# Allegro board MV2.brd
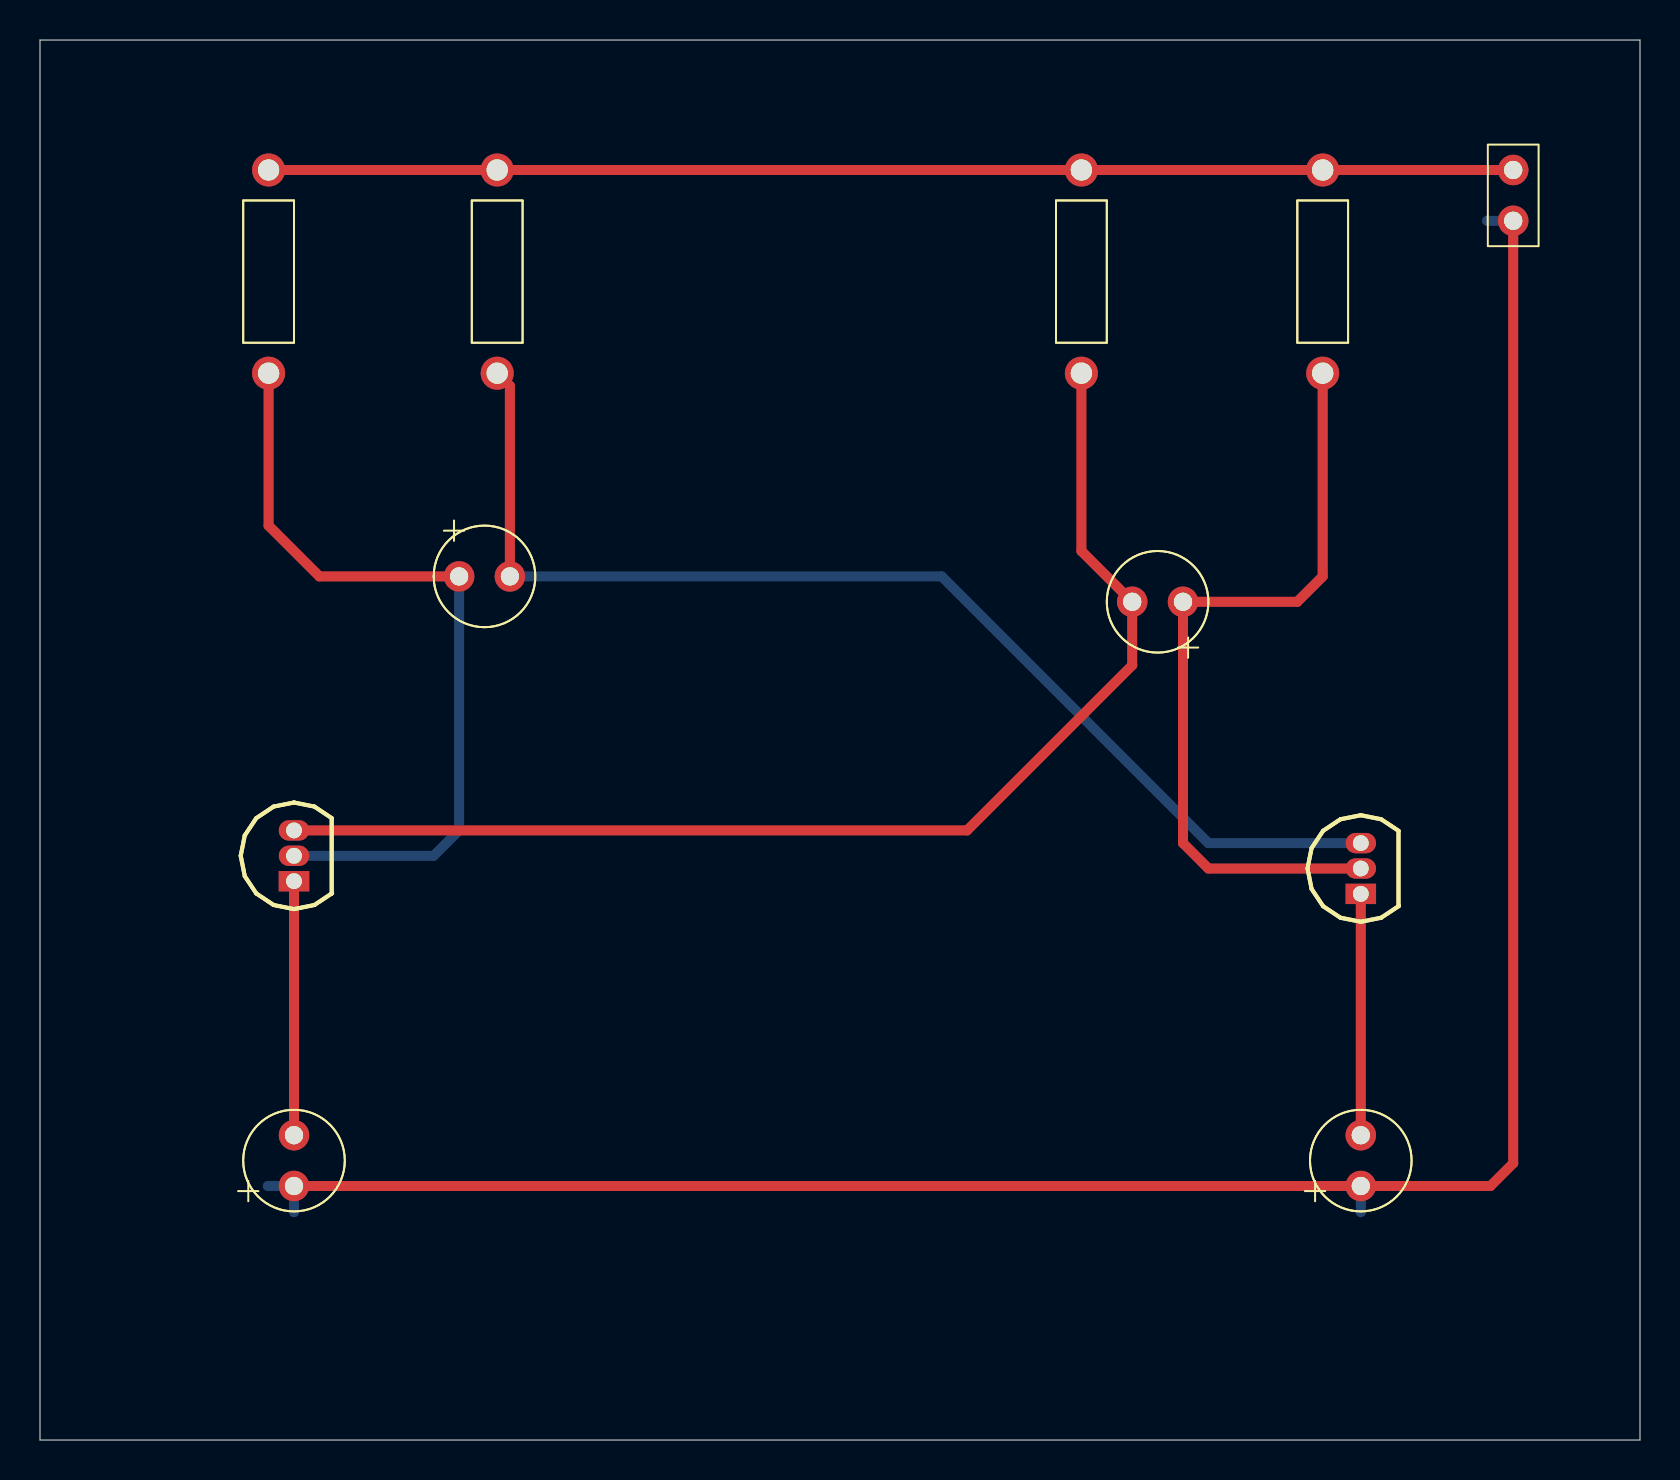
[diagram p0: board, top side]
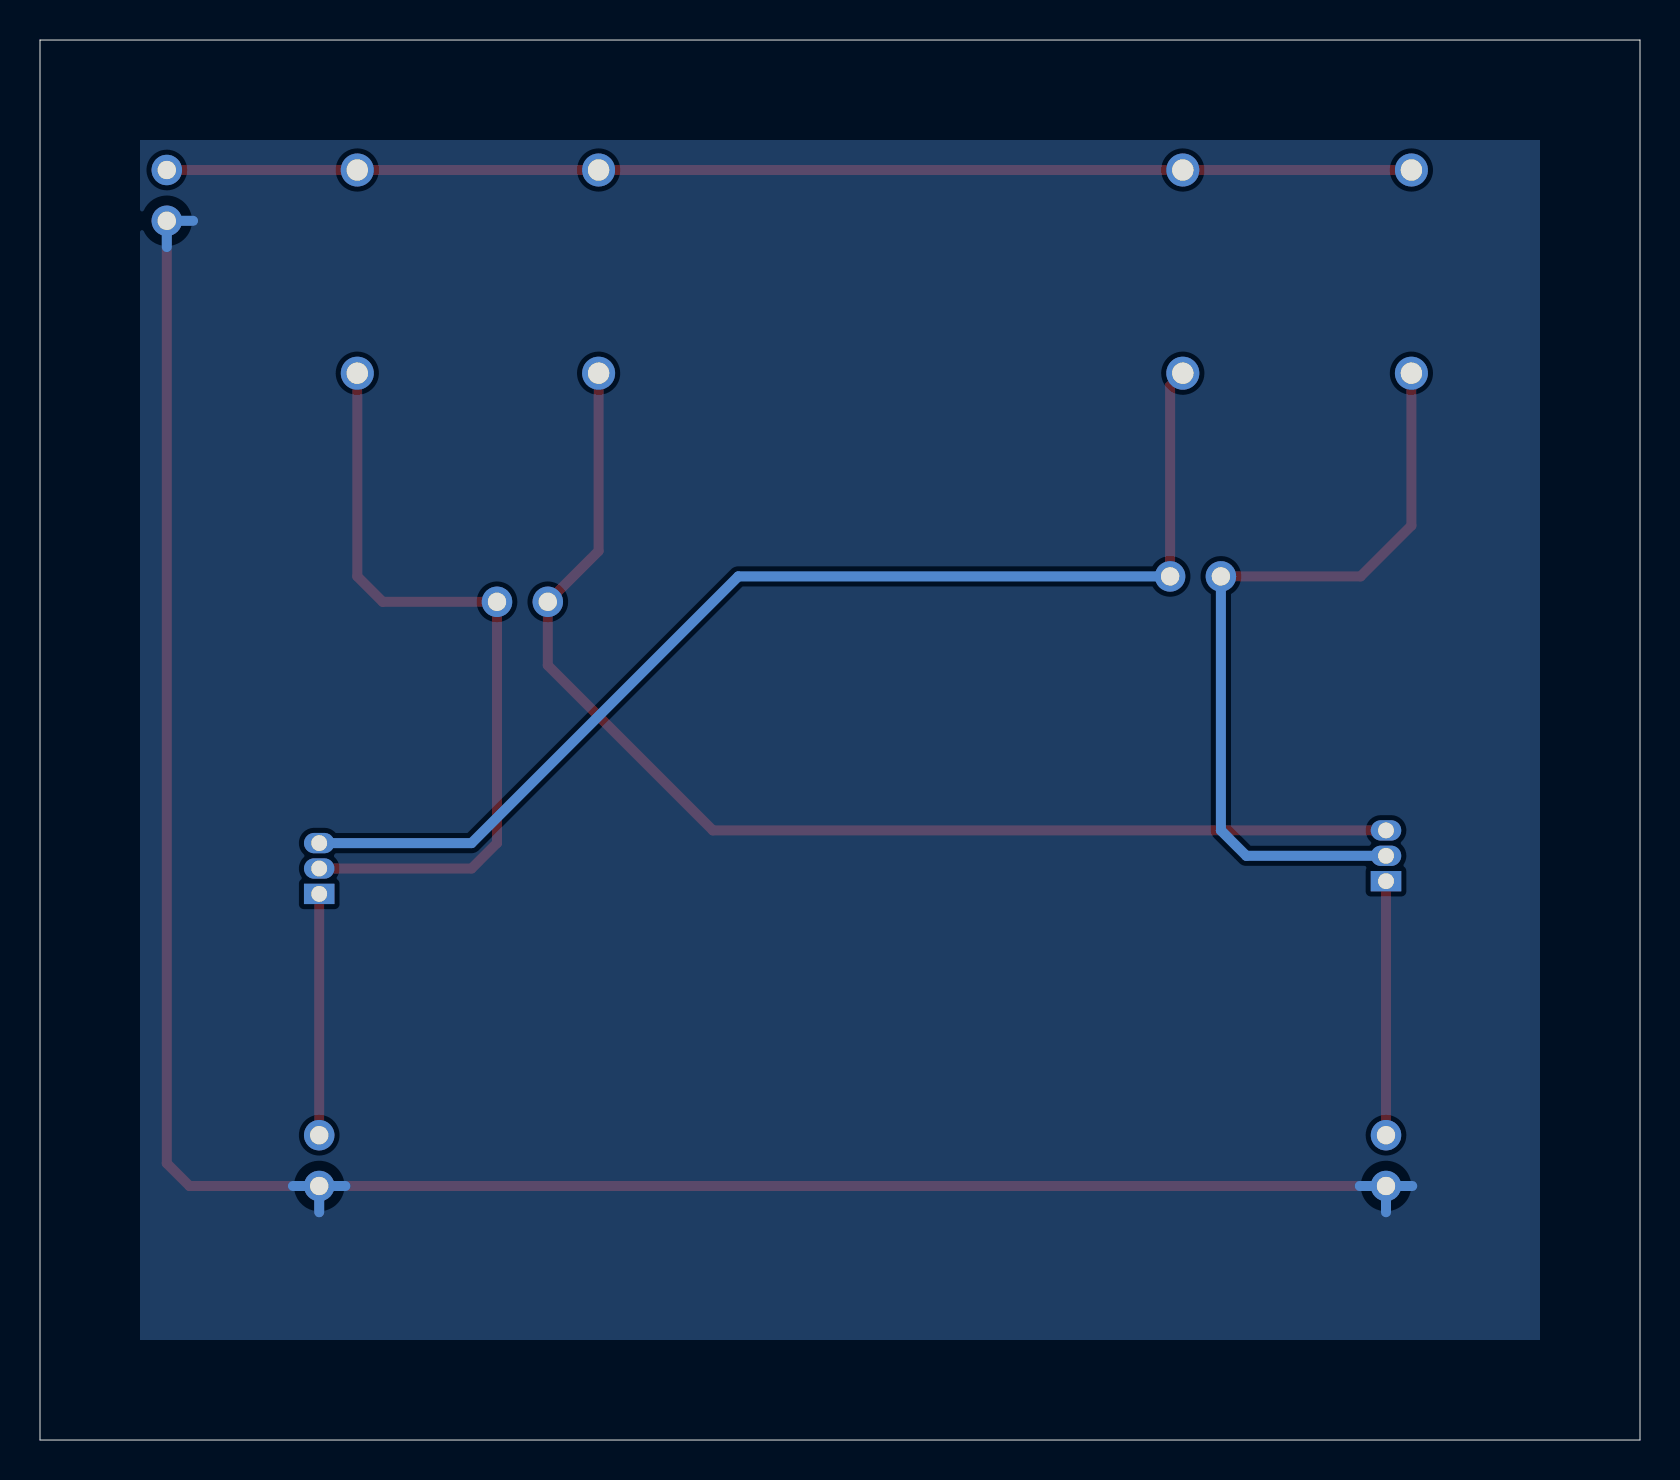
[diagram p1: board, bottom side, seen from below]

Outline 80 x 70 mm; copper layers: TOP, BOTTOM. Coordinates in mm from the lower left corner of the outline.
Outline path: 0,70 0,0 80,0 80,70 0,70

## Design rules (mm)
constraint set DEFAULT: min track width 0.5, pair gap 0.5

## Placement (name value [footprint] x y rotation side)
C1  22u  [CAP196]  20.95 43.18 270 top
C2  22u  [CAP196]  57.15 41.91 90 top
D1  LED  [CAP196]  12.7 12.7 0 top
D2  LED  [CAP196]  66.04 12.7 0 top
J1  CON2  [JUMPER2]  73.66 63.5 270 top
Q1  2SC1815  [TO92]  66.04 27.3 90 top
Q2  2SC1815  [TO92]  12.7 27.94 90 top
R1  220  [RES400]  11.43 63.5 180 top
R2  33k  [RES400]  22.86 63.5 180 top
R3  33k  [RES400]  52.07 63.5 180 top
R4  220  [RES400]  64.14 63.5 180 top

## Library data of the parts
C1 C2 = CAP POL: Tolerance: ***; User Part Number: ***
D1 D2 = LED: Tolerance: ***; User Part Number: ***
J1 = CON2: User Part Number: ***
Q1 Q2 = NPN ECB
R1-R4 = R: Tolerance: ***; User Part Number: ***

## Footprints (pads in the part's own frame, mm; a bottom-side part is the same pattern mirrored in y, then rotated)
CAP196
  round 1.524 hole 0.914: 1(0,0) 2(0,2.54)
JUMPER2
  round 1.524 hole 0.914: 1(0,0) 2(2.54,0)
RES400
  round 1.651 hole 1.067: 1(0,0) 2(0,10.16)
TO92
  rect 1.016x1.524 hole 0.787: 1(0,0)
  oval 1.016x1.524 hole 0.787: 2(1.27,0) 3(2.54,0)

## Nets
GND: D1.1(CATHODE) D2.1(CATHODE) J1.2
VCC: J1.1 R1.1 R2.1 R3.1 R4.1
N00334: C1.1 Q2.2 R1.2
N00338: C2.1 Q1.2 R4.2
N00342: D2.2 Q1.1(E)
N00346: D1.2 Q2.1(E)
N00359: C1.2 Q1.3 R2.2
N00374: C2.2 Q2.3 R3.2

## Via types
v1: diameter 0.61, hole 0.33, TOP to BOTTOM, 8 vias

## Routing (per net, layer and track width the routed paths; a pad name or vN(x,y) marks a point on that pad's centre or on a via; arc(x,y) is an arc through that point)
GND: length 119.1
  TOP w0.5: D1.1 D2.1 72.53,12.7 73.66,13.84 J1.2
  BOTTOM w0.5: 11.39,12.7 D1.1 ; D1.1 12.7,11.39 ; D1.1 14.01,12.7 ; 72.35,60.96 J1.2 73.66,59.65 ; 66.04,11.39 D2.1 ; D2.1 67.35,12.7 ; D2.1 64.73,12.7
VCC: length 62.2
  TOP w0.5: R1.1 R2.1 R3.1 R4.1 J1.1
N00334: length 39.7
  TOP w0.5: v1(20.95,43.18) 13.97,43.18 11.43,45.72 R1.2
  BOTTOM w0.5: v1(12.7,29.21) 19.68,29.21 20.95,30.48 v1(20.95,43.18)
N00338: length 39.2
  TOP w0.5: R4.2 64.14,43.18 62.87,41.91 v1(57.15,41.91) 57.15,29.84 58.42,28.57 Q1.2
N00342: length 12.1
  TOP w0.5: Q1.1 D2.2
N00346: length 12.7
  TOP w0.5: D1.2 Q2.1
N00359: length 58.5
  TOP w0.5: v1(23.5,43.18) 23.5,52.7 v1(22.86,53.34)
  BOTTOM w0.5: Q1.3 58.42,29.84 45.09,43.18 v1(23.5,43.18)
N00374: length 61
  TOP w0.5: v1(52.07,53.34) 52.07,44.45 C2.2 54.61,38.73 46.35,30.48 Q2.3

## Copper pours and planes (outline as drawn; the poured copper is in the pictures)
GND on BOTTOM: 75,5 75,65 5,65 5,5

## Text on the board
USER_PART_NUM_TOP: FIGURE | FINISHED_SIZE | 0.3302 | 0.7874 | 0.9144 | 1.0668 | DRILL CHART: TOP to BOTTOM | ALL UNITS ARE IN MILLIMETERS | PLATED | QTY | 8 | 6 | 10
